# Altium PCB be_mdv.PcbDoc (part 2 of 2)
Units mm, origin at the board's own origin, x right, y up, seen from the top; angles counter-clockwise.
Board outline 120 x 100 mm, 4 copper layers (Top Layer, GND, Signal, Bottom Layer), stack 1.781 mm thick; 140 components, 157 nets, 731 pads, 195 vias.
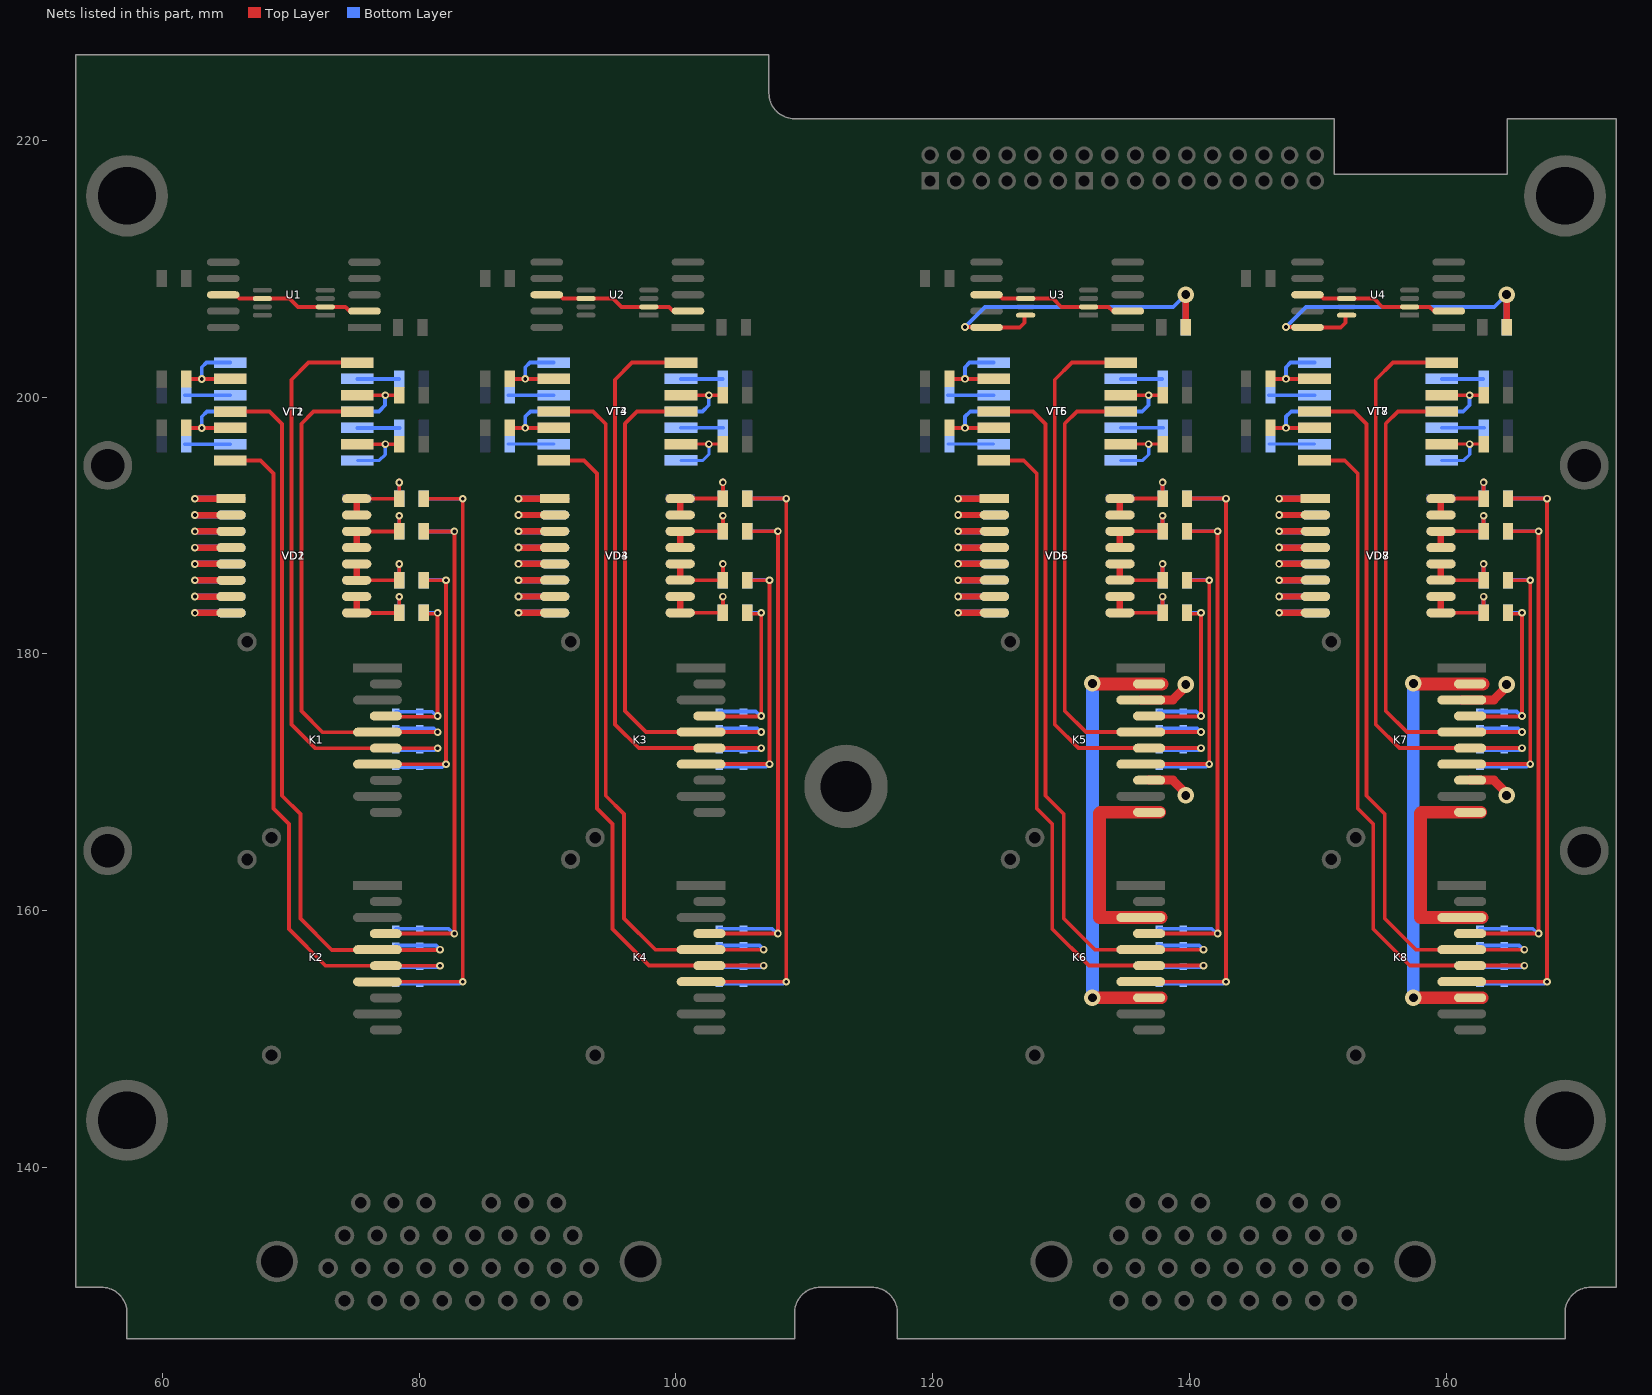
[diagram p4: the nets of this part, all layers, seen from the top]

## Via types
v1: diameter 0.6, hole 0.3, Top Layer to Bottom Layer, 143 vias
v2: diameter 1.3, hole 0.7, Top Layer to Bottom Layer, 36 vias
v3: diameter 1, hole 0.7, Top Layer to Bottom Layer, 16 vias

## Nets (pads, with @x,y where several pads share a name; then routed paths per layer and width w, separated by ;. In a path a pad name is that pad's centre, name@x,y a point inside that pad or via, vN(x,y) a via of type N, cw(c..) or ccw(c..) an arc to the next point about the centre after c; other vN are vias at no path point) (continued)
NetK5_2: K5.2 K5.7 R56.1 R57.1 U3.10 | length 36.4
  Top Layer w0.3: v1(122.526,205.46) 122.529,205.463 124.163,205.463 U3.10@124.201,205.425 126.785,205.425 127.151,205.791 U3.10@127.151,206.375
  Top Layer w0.5: R57.1@139.716,205.425 v2(139.716,207.975)
  Top Layer w0.7: K5.2@136.235,176.407 138.71,176.407 ; K5.7@136.866,170.157 138.71,170.157 v2@139.891,168.975 ; 138.691,176.407 v2@139.891,177.607
  Bottom Layer w0.3: v1(122.526,205.46) 124.071,207.005 138.746,207.005 v2(139.716,207.975)
  Bottom Layer w0.5: R56.1@139.716,205.425 v2(139.716,207.975)
  other v2: 139.716,168.975 139.716,177.607
NetK5_6: K5.6 K6.2 | length 17.6
  Top Layer w1: K5.6@137.691,167.657 K5.6@136.866,167.657 133.066,167.657 132.991,167.582 132.991,159.463 K6.2@136.216,159.463 K6.2@137.784,159.463
NetK5_10: K5.10 K6.7 | length 35.3
  Top Layer w0.3: v2(132.441,177.7) v2@132.485,177.657
  Top Layer w1: v2@132.441,153.225 132.453,153.213 K6.7@136.866,153.213 K6.7@137.784,153.213 ; v2@132.485,177.657 K5.10@136.866,177.657 K5.10@137.866,177.657
  Bottom Layer w1: v2@132.441,153.225 v2@132.441,177.675 ; v2(132.441,177.7) v2@132.466,177.675
  other v2: 132.441,153.213
NetK7_2: K7.2 K7.7 R75.1 R76.1 U4.10 | length 36.4
  Top Layer w0.3: v1(147.526,205.46) 147.529,205.463 149.163,205.463 U4.10@149.201,205.425 151.785,205.425 152.151,205.791 U4.10@152.151,206.375
  Top Layer w0.5: R76.1@164.716,205.425 v2(164.716,207.975)
  Top Layer w0.7: K7.2@161.235,176.407 163.71,176.407 ; K7.7@161.866,170.157 163.71,170.157 v2@164.891,168.975 ; 163.691,176.407 v2@164.891,177.607
  Bottom Layer w0.3: v1(147.526,205.46) 149.071,207.005 163.746,207.005 v2(164.716,207.975)
  Bottom Layer w0.5: R75.1@164.716,205.425 v2(164.716,207.975)
  other v2: 164.716,168.975 164.716,177.607
NetK7_6: K7.6 K8.2 | length 17.6
  Top Layer w1: K7.6@162.691,167.657 K7.6@161.866,167.657 158.066,167.657 157.991,167.582 157.991,159.463 K8.2@161.216,159.463 K8.2@162.784,159.463
NetK7_10: K7.10 K8.7 | length 35.3
  Top Layer w0.3: v2(157.441,177.7) v2@157.485,177.657
  Top Layer w1: v2@157.441,153.225 157.453,153.213 K8.7@161.866,153.213 K8.7@162.784,153.213 ; v2@157.485,177.657 K7.10@161.866,177.657 K7.10@162.866,177.657
  Bottom Layer w1: v2@157.441,153.225 v2@157.441,177.675 ; v2(157.441,177.7) v2@157.466,177.675
  other v2: 157.441,153.213
NetR1_2: R1.2 VT1.14 VT2.2 | length 6.4
  Top Layer w0.254: VT2.2@75.203,196.329 v1(77.376,196.329) R1.2@78.466,196.329
  Bottom Layer w0.254: VT1.14@75.203,195.059 76.916,195.059 77.376,195.519 v1(77.376,196.329)
NetR2_2: R2.2 R3.2 VD1.15 VD1.16 | length 7.5
  Top Layer w0.3: VD1.16@75.139,192.079 R3.2@78.466,192.079 78.466,193.316 78.5,193.35 v1@78.5,193.5
  Top Layer w0.5: VD1.15@75.139,190.809 VD1.16@75.139,192.079
  Bottom Layer w0.3: R2.2@78.466,192.079 v1(78.466,193.35) v1@78.466,193.5
NetR4_2: R4.2 R6.2 VD1.13 VD1.14 | length 6.8
  Top Layer w0.3: VD1.14@75.32,189.539 R6.2@78.466,189.539 v1(78.466,190.75)
  Top Layer w0.5: VD1.13@75.139,188.269 VD1.14@75.139,189.539
  Bottom Layer w0.3: R4.2@78.466,189.539 v1(78.466,190.75)
NetR5_2: R5.2 VT1.2 | length 3.5
  Bottom Layer w0.254: R5.2@61.756,196.329 VT1.2@65.297,196.329
NetR7_2: R7.2 R8.2 VD1.11 VD1.12 | length 7
  Top Layer w0.3: VD1.11@75.32,185.729 R8.2@78.466,185.729 v1(78.466,187)
  Top Layer w0.5: VD1.11@75.139,185.729 VD1.12@75.139,186.999
  Bottom Layer w0.3: R7.2@78.466,185.729 78.466,186.966 v1@78.5,187
NetR9_2: R9.2 R10.2 VD1.9 VD1.10 | length 7
  Top Layer w0.3: VD1.9@75.32,183.189 R10.2@78.466,183.189 v1(78.466,184.45) ; v1@78.466,184.466 v1@78.5,184.5
  Top Layer w0.5: VD1.9@75.139,183.189 VD1.10@75.139,184.459
  Bottom Layer w0.3: v1(78.466,184.45) R9.2@78.466,183.189 R9.2@78.483,183.206 ; v1@78.483,184.483 v1@78.5,184.5
NetR11_2: R11.2 VT1.4 VT2.12 | length 6.8
  Top Layer w0.3: R11.2@61.756,197.599 61.761,197.594 v1(63.076,197.594) 63.078,197.597 65.294,197.597 VT2.12@65.297,197.599
  Bottom Layer w0.3: v1(63.076,197.594) 63.076,198.466 63.479,198.869 VT1.4@65.297,198.869
NetR12_2: R12.2 VT1.12 | length 3.3
  Bottom Layer w0.3: VT1.12@75.203,197.599 R12.2@78.466,197.599 R12.2@78.491,197.599
NetR13_2: R13.2 VT1.11 VT2.5 | length 6.4
  Top Layer w0.3: VT2.5@75.203,200.139 v1(77.376,200.139) R13.2@78.466,200.139
  Bottom Layer w0.3: VT1.11@75.203,198.869 76.876,198.869 77.363,199.357 77.363,200.127 v1(77.376,200.139)
NetR14_2: R14.2 VT1.5 | length 3.5
  Bottom Layer w0.3: R14.2@61.756,200.139 VT1.5@65.297,200.139
NetR15_2: R15.2 VT1.7 VT2.9 | length 6.8
  Top Layer w0.3: R15.2@61.756,201.409 v1(63.076,201.409) VT2.9@65.297,201.409
  Bottom Layer w0.3: v1(63.076,201.409) 63.076,202.319 63.436,202.679 VT1.7@65.297,202.679
NetR16_2: R16.2 VT1.9 | length 3.2
  Bottom Layer w0.3: VT1.9@75.203,201.409 R16.2@78.441,201.409
NetR20_2: R20.2 VT3.14 VT4.2 | length 6.4
  Top Layer w0.254: VT4.2@100.404,196.334 v1(102.576,196.334) R20.2@103.666,196.334
  Bottom Layer w0.254: VT3.14@100.404,195.064 102.116,195.064 102.576,195.524 v1(102.576,196.334)
NetR21_2: R21.2 R22.2 VD3.15 VD3.16 | length 7.5
  Top Layer w0.3: VD3.16@100.34,192.084 R22.2@103.666,192.084 103.666,193.321 103.701,193.355 v1@103.701,193.505
  Top Layer w0.5: VD3.15@100.34,190.814 VD3.16@100.34,192.084
  Bottom Layer w0.3: R21.2@103.666,192.084 v1(103.666,193.355) v1@103.666,193.505
NetR23_2: R23.2 R25.2 VD3.13 VD3.14 | length 6.8
  Top Layer w0.3: VD3.14@100.52,189.544 R25.2@103.666,189.544 v1(103.666,190.755)
  Top Layer w0.5: VD3.13@100.34,188.274 VD3.14@100.34,189.544
  Bottom Layer w0.3: R23.2@103.666,189.544 v1(103.666,190.755)
NetR24_2: R24.2 VT3.2 | length 3.5
  Bottom Layer w0.254: R24.2@86.956,196.334 VT3.2@90.498,196.334
NetR26_2: R26.2 R27.2 VD3.11 VD3.12 | length 7
  Top Layer w0.3: VD3.11@100.52,185.734 R27.2@103.666,185.734 v1(103.666,187.005)
  Top Layer w0.5: VD3.11@100.34,185.734 VD3.12@100.34,187.004
  Bottom Layer w0.3: R26.2@103.666,185.734 103.666,186.971 v1@103.701,187.005
NetR28_2: R28.2 R29.2 VD3.9 VD3.10 | length 7
  Top Layer w0.3: VD3.9@100.52,183.194 R29.2@103.666,183.194 v1(103.666,184.455) ; v1@103.666,184.471 v1@103.701,184.505
  Top Layer w0.5: VD3.9@100.34,183.194 VD3.10@100.34,184.464
  Bottom Layer w0.3: v1(103.666,184.455) R28.2@103.666,183.194 R28.2@103.683,183.211 ; v1@103.683,184.488 v1@103.701,184.505
NetR30_2: R30.2 VT3.4 VT4.12 | length 6.8
  Top Layer w0.3: R30.2@86.956,197.604 86.961,197.599 v1(88.276,197.599) 88.279,197.602 90.495,197.602 VT4.12@90.498,197.604
  Bottom Layer w0.3: v1(88.276,197.599) 88.276,198.471 88.68,198.874 VT3.4@90.498,198.874
NetR31_2: R31.2 VT3.12 | length 3.3
  Bottom Layer w0.3: VT3.12@100.404,197.604 R31.2@103.666,197.604 R31.2@103.691,197.604
NetR32_2: R32.2 VT3.11 VT4.5 | length 6.4
  Top Layer w0.3: VT4.5@100.404,200.144 v1(102.576,200.144) R32.2@103.666,200.144
  Bottom Layer w0.3: VT3.11@100.404,198.874 102.076,198.874 102.564,199.362 102.564,200.132 v1(102.576,200.144)
NetR33_2: R33.2 VT3.5 | length 3.5
  Bottom Layer w0.3: R33.2@86.956,200.144 VT3.5@90.498,200.144
NetR34_2: R34.2 VT3.7 VT4.9 | length 6.8
  Top Layer w0.3: R34.2@86.956,201.414 v1(88.276,201.414) VT4.9@90.498,201.414
  Bottom Layer w0.3: v1(88.276,201.414) 88.276,202.324 88.636,202.684 VT3.7@90.498,202.684
NetR35_2: R35.2 VT3.9 | length 3.2
  Bottom Layer w0.3: VT3.9@100.404,201.414 R35.2@103.641,201.414
NetR39_2: R39.2 VT5.14 VT6.2 | length 6.4
  Top Layer w0.254: VT6.2@134.654,196.334 v1(136.826,196.334) R39.2@137.916,196.334
  Bottom Layer w0.254: VT5.14@134.654,195.064 136.366,195.064 136.826,195.524 v1(136.826,196.334)
NetR40_2: R40.2 R41.2 VD5.15 VD5.16 | length 7.5
  Top Layer w0.3: VD5.16@134.59,192.084 R41.2@137.916,192.084 137.916,193.321 137.951,193.355 v1@137.951,193.505
  Top Layer w0.5: VD5.15@134.59,190.814 VD5.16@134.59,192.084
  Bottom Layer w0.3: R40.2@137.916,192.084 v1(137.916,193.355) v1@137.916,193.505
NetR42_2: R42.2 R44.2 VD5.13 VD5.14 | length 6.8
  Top Layer w0.3: VD5.14@134.77,189.544 R44.2@137.916,189.544 v1(137.916,190.755)
  Top Layer w0.5: VD5.13@134.59,188.274 VD5.14@134.59,189.544
  Bottom Layer w0.3: R42.2@137.916,189.544 v1(137.916,190.755)
NetR43_2: R43.2 VT5.2 | length 3.5
  Bottom Layer w0.254: R43.2@121.206,196.334 VT5.2@124.748,196.334
NetR45_2: R45.2 R46.2 VD5.11 VD5.12 | length 7
  Top Layer w0.3: VD5.11@134.77,185.734 R46.2@137.916,185.734 v1(137.916,187.005)
  Top Layer w0.5: VD5.11@134.59,185.734 VD5.12@134.59,187.004
  Bottom Layer w0.3: R45.2@137.916,185.734 137.916,186.971 v1@137.951,187.005
NetR47_2: R47.2 R48.2 VD5.9 VD5.10 | length 7
  Top Layer w0.3: VD5.9@134.77,183.194 R48.2@137.916,183.194 v1(137.916,184.455) ; v1@137.916,184.471 v1@137.951,184.505
  Top Layer w0.5: VD5.9@134.59,183.194 VD5.10@134.59,184.464
  Bottom Layer w0.3: v1(137.916,184.455) R47.2@137.916,183.194 R47.2@137.933,183.211 ; v1@137.933,184.488 v1@137.951,184.505
NetR49_2: R49.2 VT5.4 VT6.12 | length 6.8
  Top Layer w0.3: R49.2@121.206,197.604 121.211,197.599 v1(122.526,197.599) 122.529,197.602 124.745,197.602 VT6.12@124.748,197.604
  Bottom Layer w0.3: v1(122.526,197.599) 122.526,198.471 122.93,198.874 VT5.4@124.748,198.874
NetR50_2: R50.2 VT5.12 | length 3.3
  Bottom Layer w0.3: VT5.12@134.654,197.604 R50.2@137.916,197.604 R50.2@137.941,197.604
NetR51_2: R51.2 VT5.11 VT6.5 | length 6.4
  Top Layer w0.3: VT6.5@134.654,200.144 v1(136.826,200.144) R51.2@137.916,200.144
  Bottom Layer w0.3: VT5.11@134.654,198.874 136.326,198.874 136.814,199.362 136.814,200.132 v1(136.826,200.144)
NetR52_2: R52.2 VT5.5 | length 3.5
  Bottom Layer w0.3: R52.2@121.206,200.144 VT5.5@124.748,200.144
NetR53_2: R53.2 VT5.7 VT6.9 | length 6.8
  Top Layer w0.3: R53.2@121.206,201.414 v1(122.526,201.414) VT6.9@124.748,201.414
  Bottom Layer w0.3: v1(122.526,201.414) 122.526,202.324 122.886,202.684 VT5.7@124.748,202.684
NetR54_2: R54.2 VT5.9 | length 3.2
  Bottom Layer w0.3: VT5.9@134.654,201.414 R54.2@137.891,201.414
NetR58_2: R58.2 VT7.14 VT8.2 | length 6.4
  Top Layer w0.254: VT8.2@159.654,196.334 v1(161.826,196.334) R58.2@162.916,196.334
  Bottom Layer w0.254: VT7.14@159.654,195.064 161.366,195.064 161.826,195.524 v1(161.826,196.334)
NetR59_2: R59.2 R60.2 VD7.15 VD7.16 | length 7.5
  Top Layer w0.3: VD7.16@159.59,192.084 R60.2@162.916,192.084 162.916,193.321 162.951,193.355 v1@162.951,193.505
  Top Layer w0.5: VD7.15@159.59,190.814 VD7.16@159.59,192.084
  Bottom Layer w0.3: R59.2@162.916,192.084 v1(162.916,193.355) v1@162.916,193.505
NetR61_2: R61.2 R63.2 VD7.13 VD7.14 | length 6.8
  Top Layer w0.3: VD7.14@159.77,189.544 R63.2@162.916,189.544 v1(162.916,190.755)
  Top Layer w0.5: VD7.13@159.59,188.274 VD7.14@159.59,189.544
  Bottom Layer w0.3: R61.2@162.916,189.544 v1(162.916,190.755)
NetR62_2: R62.2 VT7.2 | length 3.5
  Bottom Layer w0.254: R62.2@146.206,196.334 VT7.2@149.748,196.334
NetR64_2: R64.2 R65.2 VD7.11 VD7.12 | length 7
  Top Layer w0.3: VD7.11@159.77,185.734 R65.2@162.916,185.734 v1(162.916,187.005)
  Top Layer w0.5: VD7.11@159.59,185.734 VD7.12@159.59,187.004
  Bottom Layer w0.3: R64.2@162.916,185.734 162.916,186.971 v1@162.951,187.005
NetR66_2: R66.2 R67.2 VD7.9 VD7.10 | length 7
  Top Layer w0.3: VD7.9@159.77,183.194 R67.2@162.916,183.194 v1(162.916,184.455) ; v1@162.916,184.471 v1@162.951,184.505
  Top Layer w0.5: VD7.9@159.59,183.194 VD7.10@159.59,184.464
  Bottom Layer w0.3: v1(162.916,184.455) R66.2@162.916,183.194 R66.2@162.933,183.211 ; v1@162.933,184.488 v1@162.951,184.505
NetR68_2: R68.2 VT7.4 VT8.12 | length 6.8
  Top Layer w0.3: R68.2@146.206,197.604 146.211,197.599 v1(147.526,197.599) 147.529,197.602 149.745,197.602 VT8.12@149.748,197.604
  Bottom Layer w0.3: v1(147.526,197.599) 147.526,198.471 147.93,198.874 VT7.4@149.748,198.874
NetR69_2: R69.2 VT7.12 | length 3.3
  Bottom Layer w0.3: VT7.12@159.654,197.604 R69.2@162.916,197.604 R69.2@162.941,197.604
NetR70_2: R70.2 VT7.11 VT8.5 | length 6.4
  Top Layer w0.3: VT8.5@159.654,200.144 v1(161.826,200.144) R70.2@162.916,200.144
  Bottom Layer w0.3: VT7.11@159.654,198.874 161.326,198.874 161.814,199.362 161.814,200.132 v1(161.826,200.144)
NetR71_2: R71.2 VT7.5 | length 3.5
  Bottom Layer w0.3: R71.2@146.206,200.144 VT7.5@149.748,200.144
NetR72_2: R72.2 VT7.7 VT8.9 | length 6.8
  Top Layer w0.3: R72.2@146.206,201.414 v1(147.526,201.414) VT8.9@149.748,201.414
  Bottom Layer w0.3: v1(147.526,201.414) 147.526,202.324 147.886,202.684 VT7.7@149.748,202.684
NetR73_2: R73.2 VT7.9 | length 3.2
  Bottom Layer w0.3: VT7.9@159.654,201.414 R73.2@162.891,201.414
NetU1_2: U1.2 U1.8 | length 11.4
  Top Layer w0.3: U1.8@64.65,207.96 65.711,207.96 66.001,207.67 U1.8@67.7,207.67 ; U1.8@67.8,207.67 69.917,207.67 70.567,207.02 U1.2@72.7,207.02 74.259,207.02 74.589,206.69 U1.2@75.65,206.69
NetU2_2: U2.2 U2.8 | length 11.4
  Top Layer w0.3: U2.8@89.851,207.965 90.911,207.965 91.201,207.675 U2.8@92.901,207.675 ; U2.8@93.001,207.675 95.118,207.675 95.768,207.025 U2.2@97.901,207.025 99.46,207.025 99.79,206.695 U2.2@100.851,206.695
NetU3_2: U3.2 U3.8 | length 11.4
  Top Layer w0.3: U3.8@124.101,207.965 125.161,207.965 125.451,207.675 U3.8@127.151,207.675 ; U3.8@127.251,207.675 129.368,207.675 130.018,207.025 U3.2@132.151,207.025 133.71,207.025 134.04,206.695 U3.2@135.101,206.695
NetU4_2: U4.2 U4.8 | length 11.4
  Top Layer w0.3: U4.8@149.101,207.965 150.161,207.965 150.451,207.675 U4.8@152.151,207.675 ; U4.8@152.251,207.675 154.368,207.675 155.018,207.025 U4.2@157.151,207.025 158.71,207.025 159.04,206.695 U4.2@160.101,206.695
NetVD1_1: VD1.1 VD2.16 | length 6
  Top Layer w0.5: v1(62.541,192.079) VD1.1@65.541,192.079
  Bottom Layer w0.5: v1(62.541,192.079) VD2.16@65.541,192.079
NetVD1_2: VD1.2 VD2.15 | length 6
  Top Layer w0.5: v1(62.541,190.809) VD1.2@65.541,190.809
  Bottom Layer w0.5: v1(62.541,190.809) VD2.15@65.541,190.809
NetVD1_3: VD1.3 VD2.14 | length 6
  Top Layer w0.5: v1(62.541,189.539) VD1.3@65.541,189.539
  Bottom Layer w0.5: v1(62.541,189.539) VD2.14@65.541,189.539
NetVD1_4: VD1.4 VD2.13 | length 6
  Top Layer w0.5: v1(62.541,188.269) VD1.4@65.541,188.269
  Bottom Layer w0.5: v1(62.541,188.269) VD2.13@65.541,188.269
NetVD1_5: VD1.5 VD2.12 | length 6
  Top Layer w0.5: v1(62.541,186.999) VD1.5@65.541,186.999
  Bottom Layer w0.5: v1(62.541,186.999) VD2.12@65.541,186.999
NetVD1_6: VD1.6 VD2.11 | length 6
  Top Layer w0.5: v1(62.541,185.729) VD1.6@65.541,185.729
  Bottom Layer w0.5: v1(62.541,185.729) VD2.11@65.541,185.729
NetVD1_7: VD1.7 VD2.10 | length 6
  Top Layer w0.5: v1(62.541,184.459) VD1.7@65.541,184.459
  Bottom Layer w0.5: v1(62.541,184.459) VD2.10@65.541,184.459
NetVD1_8: VD1.8 VD2.9 | length 6
  Top Layer w0.5: v1(62.541,183.189) VD1.8@65.541,183.189
  Bottom Layer w0.5: v1(62.541,183.189) VD2.9@65.541,183.189
NetVD3_1: VD3.1 VD4.16 | length 6
  Top Layer w0.5: v1(87.741,192.084) VD3.1@90.741,192.084
  Bottom Layer w0.5: v1(87.741,192.084) VD4.16@90.741,192.084
NetVD3_2: VD3.2 VD4.15 | length 6
  Top Layer w0.5: v1(87.741,190.814) VD3.2@90.741,190.814
  Bottom Layer w0.5: v1(87.741,190.814) VD4.15@90.741,190.814
NetVD3_3: VD3.3 VD4.14 | length 6
  Top Layer w0.5: v1(87.741,189.544) VD3.3@90.741,189.544
  Bottom Layer w0.5: v1(87.741,189.544) VD4.14@90.741,189.544
NetVD3_4: VD3.4 VD4.13 | length 6
  Top Layer w0.5: v1(87.741,188.274) VD3.4@90.741,188.274
  Bottom Layer w0.5: v1(87.741,188.274) VD4.13@90.741,188.274
NetVD3_5: VD3.5 VD4.12 | length 6
  Top Layer w0.5: v1(87.741,187.004) VD3.5@90.741,187.004
  Bottom Layer w0.5: v1(87.741,187.004) VD4.12@90.741,187.004
NetVD3_6: VD3.6 VD4.11 | length 6
  Top Layer w0.5: v1(87.741,185.734) VD3.6@90.741,185.734
  Bottom Layer w0.5: v1(87.741,185.734) VD4.11@90.741,185.734
NetVD3_7: VD3.7 VD4.10 | length 6
  Top Layer w0.5: v1(87.741,184.464) VD3.7@90.741,184.464
  Bottom Layer w0.5: v1(87.741,184.464) VD4.10@90.741,184.464
NetVD3_8: VD3.8 VD4.9 | length 6
  Top Layer w0.5: v1(87.741,183.194) VD3.8@90.741,183.194
  Bottom Layer w0.5: v1(87.741,183.194) VD4.9@90.741,183.194
NetVD5_1: VD5.1 VD6.16 | length 6
  Top Layer w0.5: v1(121.991,192.084) VD5.1@124.991,192.084
  Bottom Layer w0.5: v1(121.991,192.084) VD6.16@124.991,192.084
NetVD5_2: VD5.2 VD6.15 | length 6
  Top Layer w0.5: v1(121.991,190.814) VD5.2@124.991,190.814
  Bottom Layer w0.5: v1(121.991,190.814) VD6.15@124.991,190.814
NetVD5_3: VD5.3 VD6.14 | length 6
  Top Layer w0.5: v1(121.991,189.544) VD5.3@124.991,189.544
  Bottom Layer w0.5: v1(121.991,189.544) VD6.14@124.991,189.544
NetVD5_4: VD5.4 VD6.13 | length 6
  Top Layer w0.5: v1(121.991,188.274) VD5.4@124.991,188.274
  Bottom Layer w0.5: v1(121.991,188.274) VD6.13@124.991,188.274
NetVD5_5: VD5.5 VD6.12 | length 6
  Top Layer w0.5: v1(121.991,187.004) VD5.5@124.991,187.004
  Bottom Layer w0.5: v1(121.991,187.004) VD6.12@124.991,187.004
NetVD5_6: VD5.6 VD6.11 | length 6
  Top Layer w0.5: v1(121.991,185.734) VD5.6@124.991,185.734
  Bottom Layer w0.5: v1(121.991,185.734) VD6.11@124.991,185.734
NetVD5_7: VD5.7 VD6.10 | length 6
  Top Layer w0.5: v1(121.991,184.464) VD5.7@124.991,184.464
  Bottom Layer w0.5: v1(121.991,184.464) VD6.10@124.991,184.464
NetVD5_8: VD5.8 VD6.9 | length 6
  Top Layer w0.5: v1(121.991,183.194) VD5.8@124.991,183.194
  Bottom Layer w0.5: v1(121.991,183.194) VD6.9@124.991,183.194
NetVD7_1: VD7.1 VD8.16 | length 6
  Top Layer w0.5: v1(146.991,192.084) VD7.1@149.991,192.084
  Bottom Layer w0.5: v1(146.991,192.084) VD8.16@149.991,192.084
NetVD7_2: VD7.2 VD8.15 | length 6
  Top Layer w0.5: v1(146.991,190.814) VD7.2@149.991,190.814
  Bottom Layer w0.5: v1(146.991,190.814) VD8.15@149.991,190.814
NetVD7_3: VD7.3 VD8.14 | length 6
  Top Layer w0.5: v1(146.991,189.544) VD7.3@149.991,189.544
  Bottom Layer w0.5: v1(146.991,189.544) VD8.14@149.991,189.544
NetVD7_4: VD7.4 VD8.13 | length 6
  Top Layer w0.5: v1(146.991,188.274) VD7.4@149.991,188.274
  Bottom Layer w0.5: v1(146.991,188.274) VD8.13@149.991,188.274
NetVD7_5: VD7.5 VD8.12 | length 6
  Top Layer w0.5: v1(146.991,187.004) VD7.5@149.991,187.004
  Bottom Layer w0.5: v1(146.991,187.004) VD8.12@149.991,187.004
NetVD7_6: VD7.6 VD8.11 | length 6
  Top Layer w0.5: v1(146.991,185.734) VD7.6@149.991,185.734
  Bottom Layer w0.5: v1(146.991,185.734) VD8.11@149.991,185.734
NetVD7_7: VD7.7 VD8.10 | length 6
  Top Layer w0.5: v1(146.991,184.464) VD7.7@149.991,184.464
  Bottom Layer w0.5: v1(146.991,184.464) VD8.10@149.991,184.464
NetVD7_8: VD7.8 VD8.9 | length 6
  Top Layer w0.5: v1(146.991,183.194) VD7.8@149.991,183.194
  Bottom Layer w0.5: v1(146.991,183.194) VD8.9@149.991,183.194
Реле_1Л(+)_dv_commutator_v21: C1.2 C2.2 K1.4 R7.1 R8.1 | length 25.1
  Top Layer w0.3: K1.4@78.407,171.402 v1(82.1,171.402) v1(82.1,185.729) R8.1@80.726,185.729
  Bottom Layer w0.3: C2.2@78.191,171.195 C1.2@80.066,171.195 81.812,171.195 82.019,171.402 v1(82.1,171.402) ; R7.1@80.366,185.737 82.092,185.737 v1(82.1,185.729)
Реле_1Л(+)_dv_commutator_v22: C9.2 C10.2 K3.4 R26.1 R27.1 | length 25.1
  Top Layer w0.3: K3.4@103.607,171.407 v1(107.301,171.407) v1(107.301,185.734) R27.1@105.926,185.734
  Bottom Layer w0.3: C10.2@103.391,171.2 C9.2@105.266,171.2 107.013,171.2 107.219,171.407 v1(107.301,171.407) ; R26.1@105.566,185.742 107.293,185.742 v1(107.301,185.734)
Реле_1Л(+)_dv_commutator_v23: C17.2 C18.2 K5.4 R45.1 R46.1 | length 25.1
  Top Layer w0.3: K5.4@137.857,171.407 v1(141.551,171.407) v1(141.551,185.734) R46.1@140.176,185.734
  Bottom Layer w0.3: C18.2@137.641,171.2 C17.2@139.516,171.2 141.317,171.2 141.523,171.407 v1(141.551,171.407) ; R45.1@139.816,185.742 141.543,185.742 v1(141.551,185.734)
Реле_1Л(+)_dv_commutator_v24: C25.2 C26.2 K7.4 R64.1 R65.1 | length 25.1
  Top Layer w0.3: K7.4@162.857,171.407 v1(166.551,171.407) v1(166.551,185.734) R65.1@165.176,185.734
  Bottom Layer w0.3: C26.2@162.641,171.2 C25.2@164.516,171.2 166.263,171.2 166.469,171.407 v1(166.551,171.407) ; R64.1@164.816,185.742 166.543,185.742 v1(166.551,185.734)
Реле_1Л(-)_dv_commutator_v21: C1.1 C2.1 K1.8 VT2.7 | length 48
  Top Layer w0.3: VT2.7@75.203,202.679 71.4,202.679 70.066,201.345 70.066,174.495 71.909,172.652 K1.8@77.416,172.652 v1(81.45,172.652)
  Bottom Layer w0.3: C2.1@78.191,172.495 C1.1@80.066,172.495 80.071,172.5 81.217,172.5 81.369,172.652 v1(81.45,172.652)
Реле_1Л(-)_dv_commutator_v22: C9.1 C10.1 K3.8 VT4.7 | length 48
  Top Layer w0.3: VT4.7@100.404,202.684 96.6,202.684 95.266,201.35 95.266,174.5 97.11,172.657 K3.8@102.616,172.657 v1(106.651,172.657)
  Bottom Layer w0.3: C10.1@103.391,172.5 C9.1@105.266,172.5 106.413,172.5 106.569,172.657 v1(106.651,172.657)
Реле_1Л(-)_dv_commutator_v23: C17.1 C18.1 K5.8 VT6.7 | length 48
  Top Layer w0.3: VT6.7@134.654,202.684 130.85,202.684 129.516,201.35 129.516,174.5 131.36,172.657 K5.8@136.866,172.657 v1(140.901,172.657)
  Bottom Layer w0.3: C18.1@137.641,172.5 C17.1@139.516,172.5 140.663,172.5 140.819,172.657 v1(140.901,172.657)
Реле_1Л(-)_dv_commutator_v24: C25.1 C26.1 K7.8 VT8.7 | length 48
  Top Layer w0.3: VT8.7@159.654,202.684 155.85,202.684 154.516,201.35 154.516,174.5 156.36,172.657 K7.8@161.866,172.657 v1(165.901,172.657)
  Bottom Layer w0.3: C26.1@162.641,172.5 C25.1@164.516,172.5 165.663,172.5 165.819,172.657 v1(165.901,172.657)
Реле_1П(+)_dv_commutator_v21: C3.2 C4.2 K1.9 R9.1 R10.1 | length 17.9
  Top Layer w0.3: K1.9@77.416,175.152 77.466,175.101 81.399,175.101 v1(81.45,175.152) ; R10.1@80.366,183.189 80.439,183.116 81.296,183.116 81.369,183.189 v1(81.45,183.189) v1@81.45,183.071 ; v1@81.501,175.182 81.45,175.233 v1@81.45,183.071 ; v1@81.538,183.159 v1@81.45,183.071
  Bottom Layer w0.3: C4.2@78.191,175.49 C3.2@80.066,175.49 81.03,175.49 81.369,175.152 v1(81.45,175.152) ; R9.1@80.366,183.189 v1(81.45,183.189)
Реле_1П(+)_dv_commutator_v22: C11.2 C12.2 K3.9 R28.1 R29.1 | length 17.9
  Top Layer w0.3: K3.9@102.616,175.157 102.667,175.106 106.6,175.106 v1(106.651,175.157) ; R29.1@105.566,183.194 105.639,183.121 106.496,183.121 106.569,183.194 v1(106.651,183.194) v1@106.651,183.076 ; v1@106.701,175.187 106.651,175.238 v1@106.651,183.076 ; v1@106.739,183.164 v1@106.651,183.076
  Bottom Layer w0.3: C12.2@103.391,175.495 C11.2@105.266,175.495 106.231,175.495 106.569,175.157 v1(106.651,175.157) ; R28.1@105.566,183.194 v1(106.651,183.194)
Реле_1П(+)_dv_commutator_v23: C19.2 C20.2 K5.9 R47.1 R48.1 | length 17.9
  Top Layer w0.3: K5.9@136.866,175.157 136.917,175.106 140.85,175.106 v1(140.901,175.157) ; R48.1@139.816,183.194 139.889,183.121 140.746,183.121 140.819,183.194 v1(140.901,183.194) v1@140.901,183.076 ; v1@140.951,175.187 140.901,175.238 v1@140.901,183.076 ; v1@140.989,183.164 v1@140.901,183.076
  Bottom Layer w0.3: C20.2@137.641,175.495 C19.2@139.516,175.495 140.535,175.495 140.873,175.157 v1(140.901,175.157) ; R47.1@139.816,183.194 v1(140.901,183.194)
Реле_1П(+)_dv_commutator_v24: C27.2 C28.2 K7.9 R66.1 R67.1 | length 17.9
  Top Layer w0.3: K7.9@161.866,175.157 161.917,175.106 165.85,175.106 v1(165.901,175.157) ; R67.1@164.816,183.194 164.889,183.121 165.746,183.121 165.819,183.194 v1(165.901,183.194) v1@165.901,183.076 ; v1@165.951,175.187 165.901,175.238 v1@165.901,183.076 ; v1@165.989,183.164 v1@165.901,183.076
  Bottom Layer w0.3: C28.2@162.641,175.495 C27.2@164.516,175.495 165.481,175.495 165.819,175.157 v1(165.901,175.157) ; R66.1@164.816,183.194 v1(165.901,183.194)
Реле_1П(-)_dv_commutator_v21: C3.1 C4.1 K1.3 VT2.4 | length 41.8
  Top Layer w0.3: VT2.4@75.203,198.869 71.79,198.869 70.841,197.92 70.841,175.545 72.491,173.895 K1.3@76.766,173.895 ; K1.3@76.766,173.902 v1(81.45,173.902)
  Bottom Layer w0.3: C4.1@78.191,174.19 C3.1@80.066,174.19 81.136,174.19 81.424,173.902 v1(81.45,173.902)
Реле_1П(-)_dv_commutator_v22: C11.1 C12.1 K3.3 VT4.4 | length 41.8
  Top Layer w0.3: VT4.4@100.404,198.874 96.99,198.874 96.041,197.925 96.041,175.55 97.691,173.9 K3.3@101.966,173.9 ; K3.3@101.966,173.907 v1(106.651,173.907)
  Bottom Layer w0.3: C12.1@103.391,174.195 C11.1@105.266,174.195 106.336,174.195 106.625,173.907 v1(106.651,173.907)
Реле_1П(-)_dv_commutator_v23: C19.1 C20.1 K5.3 VT6.4 | length 41.8
  Top Layer w0.3: VT6.4@134.654,198.874 131.24,198.874 130.291,197.925 130.291,175.55 131.941,173.9 K5.3@136.216,173.9 ; K5.3@136.216,173.907 v1(140.901,173.907)
  Bottom Layer w0.3: C20.1@137.641,174.195 C19.1@139.516,174.195 140.586,174.195 140.875,173.907 v1(140.901,173.907)
Реле_1П(-)_dv_commutator_v24: C27.1 C28.1 K7.3 VT8.4 | length 41.8
  Top Layer w0.3: VT8.4@159.654,198.874 156.24,198.874 155.291,197.925 155.291,175.55 156.941,173.9 K7.3@161.216,173.9 ; K7.3@161.216,173.907 v1(165.901,173.907)
  Bottom Layer w0.3: C28.1@162.641,174.195 C27.1@164.516,174.195 165.586,174.195 165.875,173.907 v1(165.901,173.907)
Реле_2Л(+)_dv_commutator_v21: C5.2 C6.2 K2.4 R2.1 R3.1 | length 55.6
  Top Layer w0.3: K2.4@76.766,154.458 v1(83.4,154.458) v1(83.4,192.079) R3.1@80.366,192.079
  Bottom Layer w0.3: C6.2@78.191,154.308 C5.2@80.066,154.308 83.169,154.308 83.319,154.458 v1(83.4,154.458) ; R2.1@80.366,192.079 v1(83.4,192.079)
Реле_2Л(+)_dv_commutator_v22: C13.2 C14.2 K4.4 R21.1 R22.1 | length 55.6
  Top Layer w0.3: K4.4@101.966,154.463 v1(108.601,154.463) v1(108.601,192.084) R22.1@105.566,192.084
  Bottom Layer w0.3: C14.2@103.391,154.313 C13.2@105.266,154.313 108.369,154.313 108.519,154.463 v1(108.601,154.463) ; R21.1@105.566,192.084 v1(108.601,192.084)
Реле_2Л(+)_dv_commutator_v23: C21.2 C22.2 K6.4 R40.1 R41.1 | length 55.6
  Top Layer w0.3: K6.4@136.216,154.463 v1(142.851,154.463) v1(142.851,192.084) R41.1@139.816,192.084
  Bottom Layer w0.3: C22.2@137.641,154.313 C21.2@139.516,154.313 142.619,154.313 142.769,154.463 v1(142.851,154.463) ; R40.1@139.816,192.084 v1(142.851,192.084)
Реле_2Л(+)_dv_commutator_v24: C29.2 C30.2 K8.4 R59.1 R60.1 | length 55.6
  Top Layer w0.3: K8.4@161.216,154.463 v1(167.851,154.463) v1(167.851,192.084) R60.1@164.816,192.084
  Bottom Layer w0.3: C30.2@162.641,154.313 C29.2@164.516,154.313 167.619,154.313 167.769,154.463 v1(167.851,154.463) ; R59.1@164.816,192.084 v1(167.851,192.084)
Реле_2Л(-)_dv_commutator_v21: C5.1 C6.1 K2.8 VT2.14 | length 56.2
  Top Layer w0.3: VT2.14@65.297,195.059 67.651,195.059 68.666,194.045 68.666,167.945 69.866,166.745 69.866,158.56 72.717,155.708 K2.8@77.416,155.708 v1(81.641,155.708)
  Bottom Layer w0.3: C6.1@78.191,155.608 C5.1@80.066,155.608 81.459,155.608 81.559,155.708 v1(81.641,155.708)
Реле_2Л(-)_dv_commutator_v22: C13.1 C14.1 K4.8 VT4.14 | length 56.3
  Top Layer w0.3: VT4.14@90.498,195.064 92.852,195.064 93.866,194.05 93.866,167.95 95.066,166.75 95.066,158.565 97.918,155.713 K4.8@102.616,155.713 v1(106.841,155.713)
  Bottom Layer w0.3: C14.1@103.391,155.613 C13.1@105.266,155.613 106.66,155.613 106.76,155.713 v1(106.841,155.713) v1@106.811,155.683
Реле_2Л(-)_dv_commutator_v23: C21.1 C22.1 K6.8 VT6.14 | length 56.2
  Top Layer w0.3: VT6.14@124.748,195.064 127.102,195.064 128.116,194.05 128.116,167.95 129.316,166.75 129.316,158.565 132.168,155.713 K6.8@136.866,155.713 v1(141.091,155.713)
  Bottom Layer w0.3: C22.1@137.641,155.613 C21.1@139.516,155.613 140.91,155.613 141.01,155.713 v1(141.091,155.713)
Реле_2Л(-)_dv_commutator_v24: C29.1 C30.1 K8.8 VT8.14 | length 56.2
  Top Layer w0.3: VT8.14@149.748,195.064 152.102,195.064 153.116,194.05 153.116,167.95 154.316,166.75 154.316,158.565 157.168,155.713 K8.8@161.866,155.713 v1(166.091,155.713)
  Bottom Layer w0.3: C30.1@162.641,155.613 C29.1@164.516,155.613 165.91,155.613 166.01,155.713 v1(166.091,155.713)
Реле_2П(+)_dv_commutator_v21: C7.2 C8.2 K2.9 R4.1 R6.1 | length 45.8
  Top Layer w0.3: K2.9@77.416,158.208 v1(82.75,158.208) v1(82.75,189.539) R6.1@80.726,189.539
  Bottom Layer w0.3: C8.2@78.191,158.583 C7.2@80.066,158.583 82.294,158.583 82.669,158.208 v1(82.75,158.208) ; R4.1@80.366,189.539 v1(82.75,189.539)
Реле_2П(+)_dv_commutator_v22: C15.2 C16.2 K4.9 R23.1 R25.1 | length 45.8
  Top Layer w0.3: K4.9@102.616,158.213 v1(107.951,158.213) v1(107.951,189.544) R25.1@105.926,189.544
  Bottom Layer w0.3: C16.2@103.391,158.588 C15.2@105.266,158.588 107.494,158.588 107.869,158.213 v1(107.951,158.213) ; R23.1@105.566,189.544 v1(107.951,189.544)
Реле_2П(+)_dv_commutator_v23: C23.2 C24.2 K6.9 R42.1 R44.1 | length 45.8
  Top Layer w0.3: K6.9@136.866,158.213 v1(142.201,158.213) v1(142.201,189.544) R44.1@140.176,189.544
  Bottom Layer w0.3: C24.2@137.641,158.588 C23.2@139.516,158.588 141.744,158.588 142.119,158.213 v1(142.201,158.213) ; R42.1@139.816,189.544 v1(142.201,189.544)
Реле_2П(+)_dv_commutator_v24: C31.2 C32.2 K8.9 R61.1 R63.1 | length 45.8
  Top Layer w0.3: K8.9@161.866,158.213 v1(167.201,158.213) v1(167.201,189.544) R63.1@165.176,189.544
  Bottom Layer w0.3: C32.2@162.641,158.588 C31.2@164.516,158.588 166.744,158.588 167.119,158.213 v1(167.201,158.213) ; R61.1@164.816,189.544 v1(167.201,189.544)
Реле_2П(-)_dv_commutator_v21: C7.1 C8.1 K2.3 VT2.11 | length 59
  Top Layer w0.3: VT2.11@65.297,198.869 68.359,198.869 69.341,197.888 69.341,168.945 70.766,167.52 70.766,159.383 73.204,156.945 76.753,156.945 K2.3@76.766,156.958 76.779,156.945 81.628,156.945 v1(81.641,156.958)
  Bottom Layer w0.3: C8.1@78.191,157.283 81.315,157.283 v1(81.641,156.958)
Реле_2П(-)_dv_commutator_v22: C15.1 C16.1 K4.3 VT4.11 | length 59
  Top Layer w0.3: VT4.11@90.498,198.874 93.56,198.874 94.541,197.893 94.541,168.95 95.966,167.525 95.966,159.388 98.404,156.95 101.953,156.95 K4.3@101.966,156.963 101.979,156.95 106.828,156.95 v1(106.841,156.963)
  Bottom Layer w0.3: C16.1@103.391,157.288 106.515,157.288 v1(106.841,156.963)
Реле_2П(-)_dv_commutator_v23: C23.1 C24.1 K6.3 VT6.11 | length 59
  Top Layer w0.3: VT6.11@124.748,198.874 127.81,198.874 128.791,197.893 128.791,168.95 130.216,167.525 130.216,159.388 132.654,156.95 136.203,156.95 K6.3@136.216,156.963 136.229,156.95 141.078,156.95 v1(141.091,156.963)
  Bottom Layer w0.3: C24.1@137.641,157.288 140.765,157.288 v1@141.09,156.963
Реле_2П(-)_dv_commutator_v24: C31.1 C32.1 K8.3 VT8.11 | length 59
  Top Layer w0.3: VT8.11@149.748,198.874 152.81,198.874 153.791,197.893 153.791,168.95 155.216,167.525 155.216,159.388 157.654,156.95 161.203,156.95 K8.3@161.216,156.963 161.229,156.95 166.078,156.95 v1(166.091,156.963)
  Bottom Layer w0.3: C32.1@162.641,157.288 C31.1@164.516,157.288 165.685,157.288 166.01,156.963 v1(166.091,156.963)
pads on no net: K1.1 K1.5 K1.11 K1.12 K2.1 K2.5 K2.11 K2.12 K3.1 K3.5 K3.11 K3.12 K4.1 K4.5 K4.11 K4.12 K5.1 K5.5 K5.11 K5.12 K6.1 K6.5 K6.11 K6.12 K7.1 K7.5 K7.11 K7.12 K8.1 K8.5 K8.11 K8.12 U1.4 U1.5 U1.6 U1.9 U2.4 U2.5 U2.6 U2.9 U3.4 U3.5 U3.6 U3.9 U4.4 U4.5 U4.6 U4.9 VT1.1 VT1.8 VT2.1 VT2.8 VT3.1 VT3.8 VT4.1 VT4.8 VT5.1 VT5.8 VT6.1 VT6.8 VT7.1 VT7.8 VT8.1 VT8.8 X1.5 X1.8 X1.9 X1.12 X1.24 X1.MH1 X1.MH2 X2.5 X2.8 X2.9 X2.12 X2.24 X2.MH1 X2.MH2

## Polygon pours and split planes (outlines as drawn)
no net on Top Layer "NONET_L01_P003" (solid, pour order 3): 123,104
no net on Top Layer "NONET_L01_P000" (solid, pour order 0): 3,104
+Б/С on GND "NONET_L04_P-001" (solid, pour order 31): 61.5,178 78.75,178 78.75,210.5 82.5,210.5 82.5,178 103.75,178 103.75,210.5 107.5,210.5 107.5,178 138,178 138,210.5 141.75,210.5 141.75,178 163,178 163,210.5 166.25,210.5 166.25,211.453 166.203,211.5 122.75,211.5 122.75,220.5 61.5,220.5
+27В_ЦМ1_ДВ4 on GND "NONET_L04_P-001" (solid, pour order 28): 152,128 167.5,128 167.5,153 161.5,153 161.5,135.5 152,135.5
+27В_ЦМ2_ДВ4 on GND "NONET_L04_P-001" (solid, pour order 23): 147.5,128 147.5,139.5 156,139.5 156,162 167,162 167,157.5 160.5,157.5 160.5,136 151.5,136 151.5,128
+27В_ЦМ2_ДВ3 on GND "GND-+27В_ЦМ2_ДВ3" (solid, pour order 22): 134.75,131.218 136.112,131.218 136.112,128 138.75,128 138.75,141.5 144.75,141.5 144.75,162 142.75,162 138.75,162 138.75,155.5 142,155.5 142,147.5 134.75,147.5
+27В_ЦМ1_ДВ3 on GND "NONET_L04_P-001" (solid, pour order 21): 141.463,155 130.25,155 130.25,151.5 130.25,128 135.75,128 135.75,131 134.25,131 134.25,148 141.463,148
+27В_ЦМ1_ДВ2 on GND "NONET_L04_P-001" (solid, pour order 20): 91.754,128 108.5,128 108.5,153 101.5,153 101.5,135.5 91.754,135.5
+27В_ЦМ2_ДВ2 on GND "NONET_L04_P-001" (solid, pour order 19): 87.5,128 87.5,139.5 96,139.5 96,162 107,162 107,157.5 100.5,157.5 100.5,136 91.248,136 91.248,128
+27В_ЦМ2_ДВ1 on GND "GND-+27В_ЦМ2_ДВ1" (solid, pour order 18): 74.354,131.355 75.862,131.355 75.862,128 78.5,128 78.5,141.5 84.5,141.5 84.5,162 82.5,162 78.5,162 78.5,155.5 81.648,155.5 81.648,147.5 74.354,147.5
+27В_ЦМ1_ДВ1 on GND "NONET_L04_P-001" (solid, pour order 17): 81.213,155 70,155 70,151.5 70,128 75.5,128 75.5,131 74,131 74,148 81.213,148
NetK3_2 on GND "NetK1_2" (solid, remove dead copper, pour order 8): 82.5,177.5 104.317,177.5 104.317,210 107,210 107,167.5 82.5,167.5
NetK1_2 on GND "NetK1_2" (solid, remove dead copper, pour order 4): 61.5,177.5 79.317,177.5 79.317,210 82,210 82,167.5 61.5,167.5
no net on GND "NONET_L04_P-001" (solid, pour order 29): 78.75,178
NetK5_2 on GND "NetK1_2" (solid, remove dead copper, pour order 12): 118.687,177.5 138.5,177.5 138.5,210 141.183,210 141.183,167.5 118.687,167.5
NetK7_2 on GND "NetK1_2" (solid, remove dead copper, pour order 11): 141.75,177.5 163.5,177.5 163.5,210 166.183,210 166.183,167.5 141.75,167.5
no net on GND "NONET_L04_P-001" (solid, pour order 13): 58.25,212
GND on Signal "Signal-GND" (solid, pour order 27): 57.255,128 168.25,128 168.25,216 149,216 149,221 57.255,221

## Other copper
Top Layer:
  region: 53.255,226.746 58.081,226.746 58.081,220.142 61.383,220.142 61.383,211.252 58.081,211.252 58.081,148.006 61.383,148.006 61.383,139.37 58.081,139.37 58.081,130.734 53.255,130.734
  region: 173.255,221.67 168.429,221.67 168.429,220.142 165.127,220.142 165.127,211.252 168.429,211.252 168.429,148.006 165.127,148.006 165.127,139.37 168.429,139.37 168.429,130.734 173.255,130.734
GND:
  pour cut-out: 142.5,210
Bottom Layer:
  region: 173.255,221.67 168.429,221.67 168.429,220.142 165.127,220.142 165.127,211.252 168.429,211.252 168.429,148.006 165.127,148.006 165.127,139.37 168.429,139.37 168.429,130.734 173.255,130.734
  region: 53.255,226.746 58.081,226.746 58.081,220.142 61.383,220.142 61.383,211.252 58.081,211.252 58.081,148.006 61.383,148.006 61.383,139.37 58.081,139.37 58.081,130.734 53.255,130.734

## Silkscreen, mask and mechanical layers (free items; w line width, h text height)
Top Solder:
  rectangle: 109.262,165.659 117.263,173.66
Bottom Solder:
  rectangle: 109.262,165.659 117.263,173.66
Mechanical 1:
  the board outline again, w0.254
Mechanical 2:
  lines w0.25: 52.755,143.67 61.755,143.67 ; 52.755,164.67 58.755,164.67 ; 52.755,194.67 58.755,194.67 ; 52.755,215.67 61.755,215.67 ; 55.755,161.67 55.755,167.67 ; 55.755,191.67 55.755,197.67 ; 57.255,139.67 57.255,147.67 ; 57.255,211.67 57.255,219.67 ; 93.655,132.67 100.855,132.67 ; 97.255,129.316 97.255,136.016 ; 108.755,169.67 117.755,169.67 ; 113.255,165.17 113.255,174.17 ; 126.055,132.67 132.455,132.67 ; 129.255,129.27 129.255,136.07 ; 164.855,143.67 173.655,143.67 ; 164.955,215.67 173.555,215.67 ; 167.855,164.67 173.655,164.67 ; 167.855,194.67 173.655,194.67 ; 169.255,139.77 169.255,147.57 ; 169.255,211.67 169.255,219.67 ; 170.755,161.87 170.755,167.47 ; 170.755,191.67 170.755,197.67
  lines w0.254: 53.255,139.512 61.002,139.512 61.002,147.894 57.7,147.894 57.7,211.521 61.129,211.521 61.129,219.827 53.255,219.827 ; 173.255,219.827 165.396,219.827 165.396,211.648 168.825,211.648 168.825,147.894 165.396,147.894 165.396,139.512 173.27,139.512 ; 109.262,165.682 117.263,165.682 117.263,173.683 109.262,173.683 109.262,165.682